# Altium PCB Main Board.PcbDoc
Units mil, origin at the board's own origin, x right, y up, seen from the top; angles counter-clockwise.
Board outline 1968 x 1968 mil, 2 copper layers (Top Layer, Bottom Layer); 67 components, 80 nets, 317 pads, 108 vias.
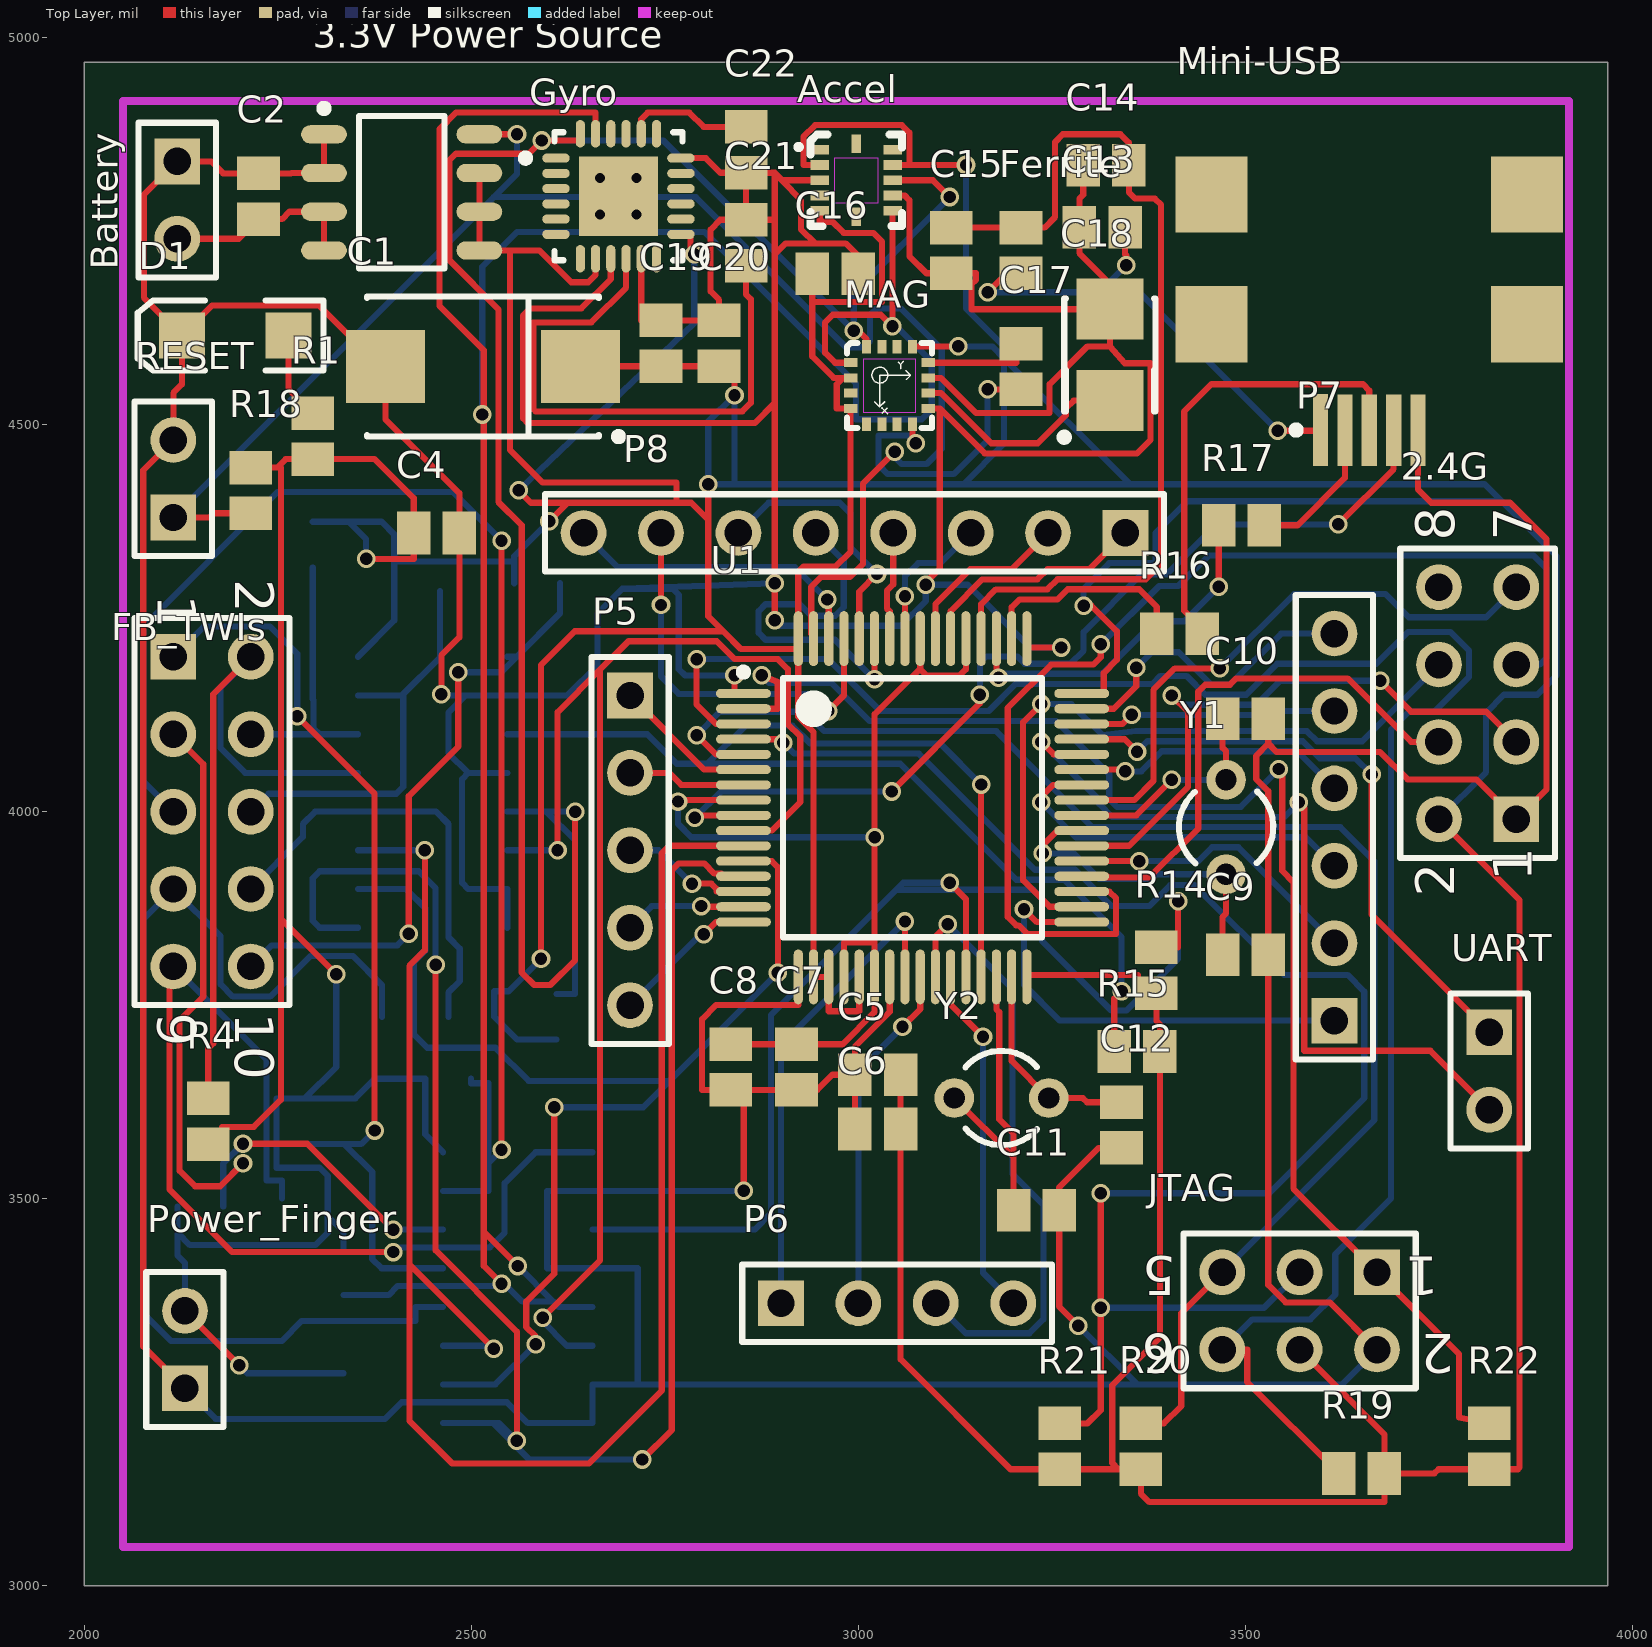
[diagram p0: Top Layer view]
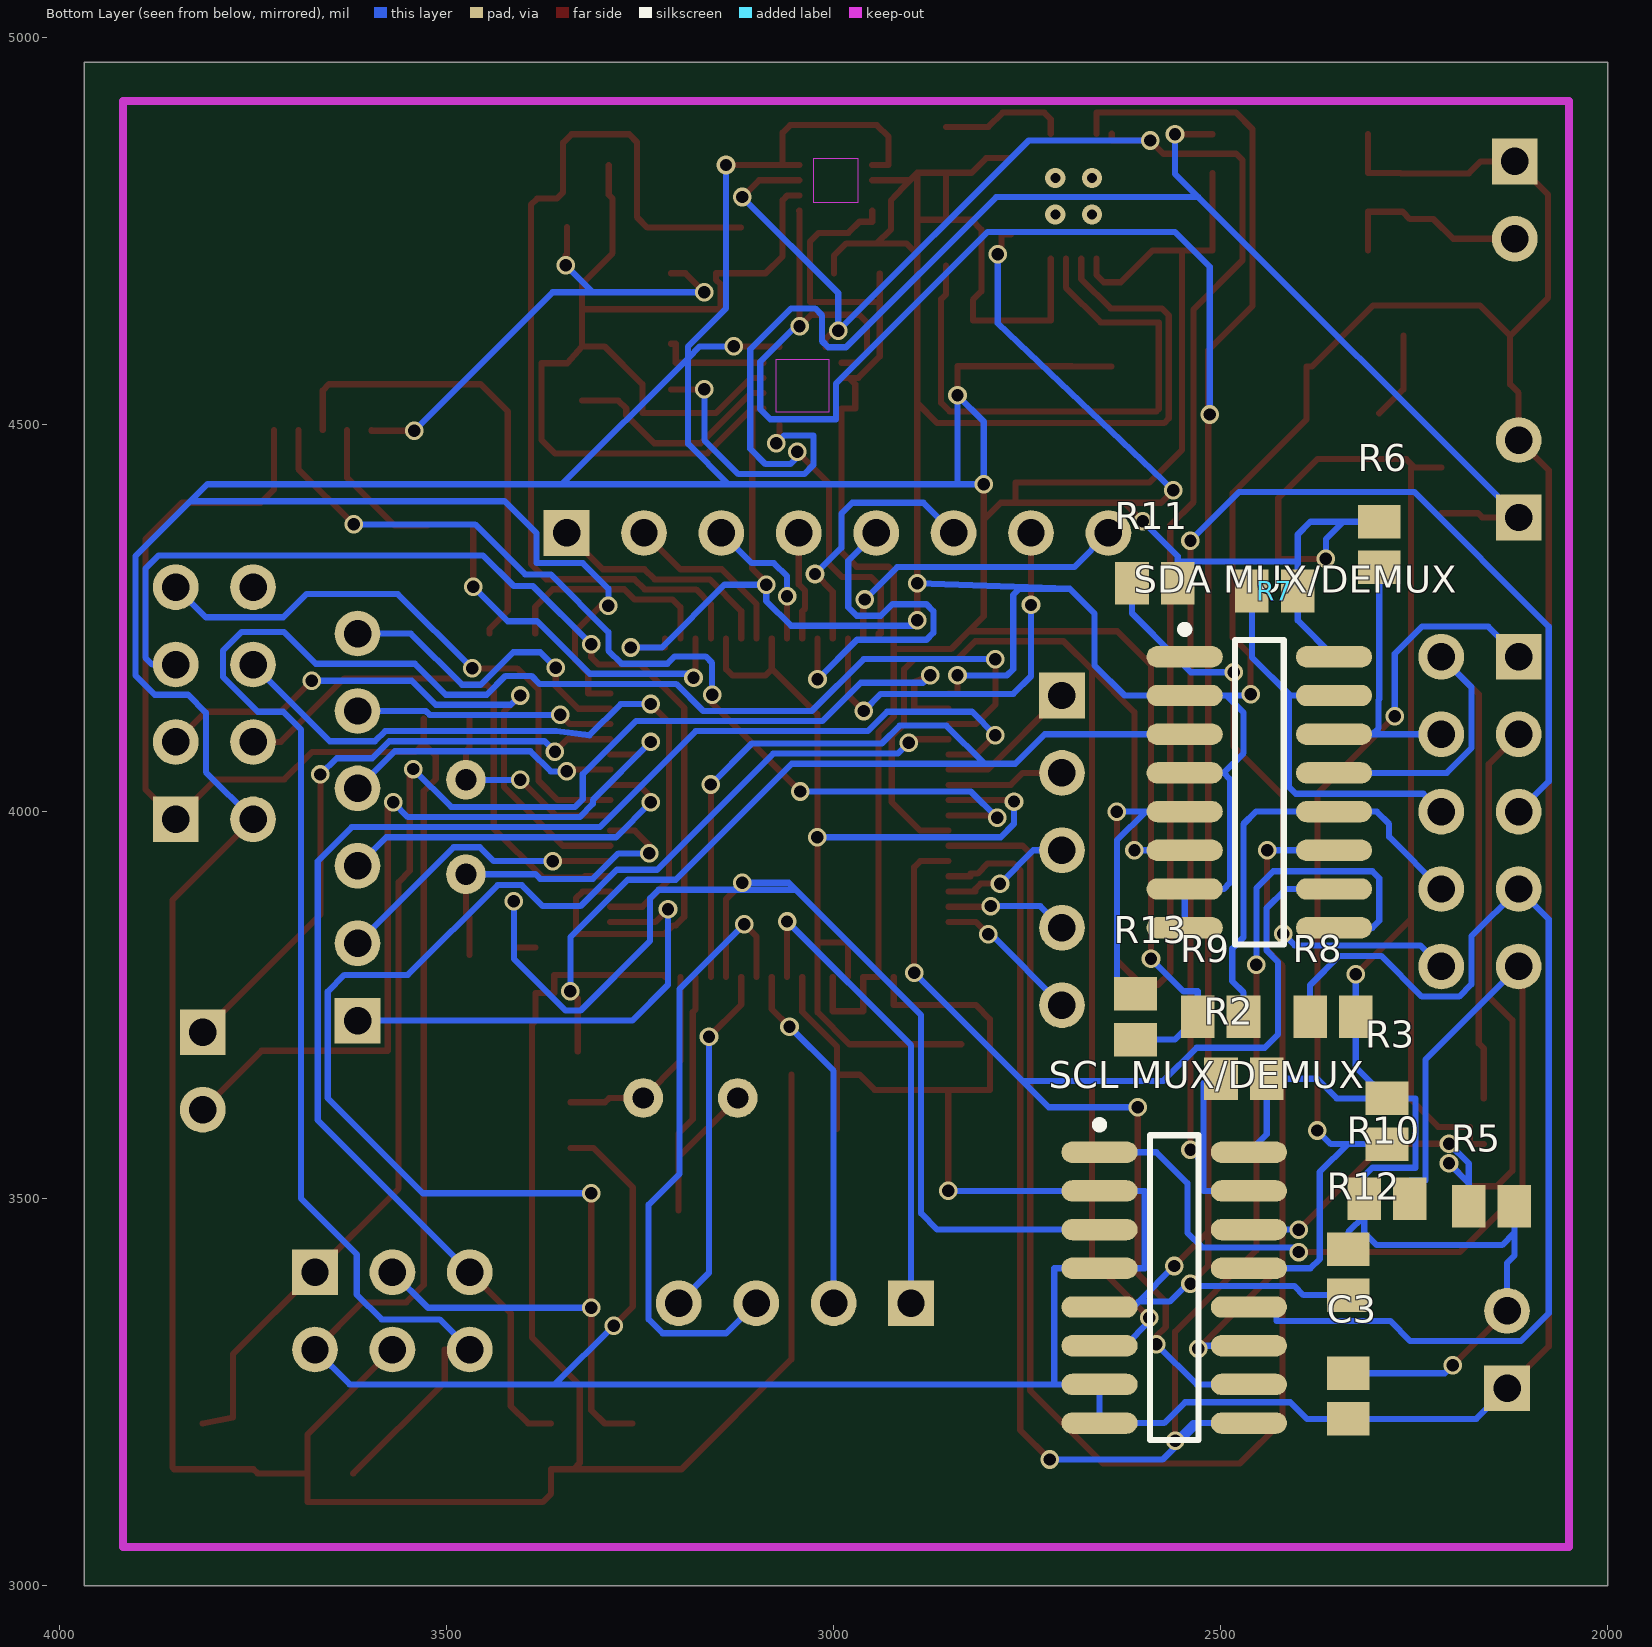
[diagram p1: Bottom Layer view, seen from below]

## Layer stack, top to bottom
Top Layer: signal copper 1.4
Dielectric: core 12.6, FR-4, Dk 4.8
Bottom Layer: signal copper 1.4

## Board outline
2000,3000 3968,3000 3968,4968 2000,4968

## Design rules (kind name [scope] priority, off if disabled: settings)
Clearance [All] p1: gap=5
PlaneClearance [All] p1: clearance=5
PolygonConnect [All] p1: connectstyle=Relief reliefconductorwidth=10 reliefentries=4 polygonreliefangle="90 Angle"
RoutingVias [All] p1: holewidth=16 width=24 viastyle="Through Hole" minholewidth=16 minwidth=24 maxholewidth=16 maxwidth=24
SilkscreenOverComponentPads [All] p1: minsilkscreentomaskgap=10
SolderMaskExpansion [All] p1: expansion=4
Width [All] p1: maxlimit=8 minlimit=8 preferedwidth=8
26 further rules are at their usual default settings.

## Classes and differential pairs
component class U_HMC5883L: C17 C18 MAG
component class 3DMouseMainBoardAssembly: P5 P6 P7 P8 Power_Finger
component class U_3: "3.3V Power Source" Battery C1 C2 D1 R1
component class U_BMA180: Accel C16
component class U_I2C_BUS_MUX: C3 C4 FB_TWIs R2 R3 R4 R5 R6 R7 R8 R9 R10 R11 R12 R13 "SCL MUX/DEMUX" "SDA MUX/DEMUX"
component class U_IMU3000: C19 C20 C21 C22 Gyro
component class "U_Main Board": 2.4G C5 C6 C7 C8 C9 C10 C11 C12 C13 C14 C15 Ferrite JTAG Mini-USB R14 R15 R16 R17 R18 R19 R20 R21 R22 RESET U1 UART Y1 Y2
net class AUX_TWI[1..0]: AUX_TWI0 AUX_TWI1
net class BUS_SEL[2..0]: BUS_SEL0 BUS_SEL1 BUS_SEL2
net class INT5_[2..0]: INT5_0 INT5_1 INT5_2
net class PA[31..0]: PA0 PA1 PA2 PA3 PA4 PA8 PA9 PA10 PA11 PA12 PA13 PA14 PA15 PA16 PA17 PA18 PA19 PA20 PA21 PA22 PA23 PA24 PA25 PA26 PA27 PA28 PA29 PA30 PA31
net class PB[11..0]: PB0 PB1 PB2 PB3 PB4 PB5 PB6 PB7 PB8 PB9 PB10 PB11
net class TWI[1..0]: TWI0 TWI1

## Components (designator, comment, footprint, x,y, rotation, side; value= is the part's Value field where it differs from the comment)
2.4G "Header 4X2" HDR2X4 3850,3990 r90 top
"3.3V Power Source" "TPS7333Q" SOIC127P600-8BL 2410,4800 r0 top
Accel "BMA180" LGA12 2950,4855 r0 top
Battery "Header 2" HDR1X2 2120,4840 r270 top
C1 "Cap Pol1" TC7343-2917 2515,4575 r180 top
C2 "Cap Semi" C0805 2225,4795 r270 top
C3 "Cap Semi" CAPC2012L 2335,3245 r90 bottom
C4 "Cap Semi" CAPC2012L 2455,4360 r180 top
C5 "Cap Semi" CAPC2012L 3025,3660 r0 top
C6 "Cap Semi" CAPC2012L 3025,3590 r0 top
C7 "Cap Semi" CAPC2012L 2920,3670 r90 top
C8 "Cap Semi" CAPC2012L 2835,3670 r90 top
C9 "Cap Semi" CAPC2012L 3500,3815 r180 top
C10 "Cap Semi" CAPC2012L 3500,4120 r180 top
C11 "Cap Semi" CAPC2012L 3230,3485 r180 top
C12 "Cap Semi" CAPC2012L 3340,3595 r90 top
C13 "Cap Semi" CAPC2012L 3315,4755 r180 top
C14 "Cap Semi" CAPC2012L 3320,4835 r180 top
C15 "Cap Semi" CAPC2012L 3120,4725 r270 top
C16 "Cap Semi" CAPC2012L 2970,4695 r180 top
C17 "Cap Semi" CAPC2012L 3210,4575 r90 top
C18 "Cap Pol1" TC3528-1411 3325,4590 r90 top
C19 "Cap Semi" CAPC2012L 2745,4605 r270 top
C20 "Cap Semi" CAPC2012L 2820,4605 r270 top
C21 "Cap Semi" CAPC2012L 2855,4735 r270 top
C22 "Cap Semi" CAPC2012L 2855,4855 r90 top
D1 "LED2" 3.2X1.6X1.1 2195,4615 r180 top
FB_TWIs "Header 5X2" HDR2X5 2115,4200 r270 top
Ferrite "Ferrite Bead 1A" C0805 3210,4725 r90 top
Gyro "IMU3000" QFN50P400X400-24V8M 2690,4795 r0 top
JTAG "Header 3X2" HDR2X3 3670,3405 r180 top
MAG "HMC5883L" HMC5883L 2990,4580 r0 top
Mini-USB "Mini USB" "Mini USB" 3660,4645 r90 top
P5 "Header 5" HDR1X5 2705,4150 r270 top
P6 "Header 4" HDR1X4 2900,3365 r0 top
P7 "Header 8" HDR1X6 3615,3730 r90 top
P8 "Header 7" HDR1X8 3345,4360 r180 top
Power_Finger "Header 2" HDR1X2 2130,3255 r90 top
R1 "Res3" C0805 2295,4485 r90 top
R2 "Res3" C0805 2470,3655 r0 bottom
R3 "Res3" C0805 2285,3600 r270 bottom
R4 "Res3" C0805 2160,3600 r90 top
R5 "Res3" C0805 2150,3490 r0 bottom
R6 "Res3" C0805 2295,4345 r270 bottom
R7 "Res3" C0805 2430,4285 r0 bottom
R8 "Res3" C0805 2355,3735 r0 bottom
R9 "Res3" C0805 2500,3735 r180 bottom
R10 "Res3" C0805 2285,3500 r180 bottom
R11 "Res3" C0805 2585,4295 r0 bottom
R12 "Res3" C0805 2335,3405 r270 bottom
R13 "Res3" C0805 2610,3735 r90 bottom
R14 "Res3" C0805 3385,3795 r270 top
R15 "Res3" C0805 3360,3690 r0 top
R16 "Res3" C0805 3415,4230 r180 top
R17 "Res3" C0805 3495,4370 r180 top
R18 "Res3" C0805 2215,4415 r270 top
R19 "Res3" C0805 3650,3145 r180 top
R20 "Res3" C0805 3365,3180 r90 top
R21 "Res3" C0805 3260,3180 r90 top
R22 "Res3" C0805 3815,3180 r90 top
RESET "Header 2" HDR1X2 2115,4380 r90 top
"SCL MUX/DEMUX" "74LV4051" SOIC16_M 2560,3385 r180 bottom
"SDA MUX/DEMUX" "74LV4051" SOIC16_M 2450,4025 r180 bottom
U1 "AT32UC3B0256-A2UT" TQFP64_N 3070,4005 r0 top
UART "Header 2" HDR1X2 3815,3715 r270 top
Y1 "XTAL 16Mhz" R38 3475,3980 r0 top
Y2 "XTAL 32.768khz" R38 3185,3630 r270 top

## Footprints (in the part's own frame and the unit in brackets; to place one, negate y for a bottom-side part, rotate by r counter-clockwise, add the part's x,y. Pads: shape width x height; smd on the part's side, far side on the other; paste and mask are expansions set on the pad)
3.2X1.6X1.1 [mm] "SMT LED; 2 Flat Leads"
  rect 1.5x1.5 smd: 1(-1.75,0) 2(1.75,0)
  silkscreen extent -2.9,-1.15 3.2,1.15
C0805 [mm] "Chip Capacitor, Body 2.0x1.3mm, IPC High Density"
  rect 1.1x1.4 smd: 1(-0.75,0) 2(0.75,0)
  body extent -1.1,-0.72 1.1,0.72, height 1.4
CAPC2012L [mm] "Chip Capacitor, Body 2.0x1.3mm, IPC High Density"
  rect 1.1x1.4 smd: 1(-0.75,0) 2(0.75,0)
  body extent -1.1,-0.72 1.1,0.72, height 1.1
HDR1X2 [mm] "Connector; Header; 2 Position"
  rect 1.5x1.5 hole 0.9: 1(0,0)
  round 1.5 hole 0.9: 2(2.54,0)
  silkscreen extent -1.27,-1.27 3.81,1.27
HDR1X4 [mm] "Connector; Header; 4 Position"
  rect 1.5x1.5 hole 0.9: 1(0,0)
  round 1.5 hole 0.9: 2(2.54,0) 3(5.08,0) 4(7.62,0)
  silkscreen extent -1.27,-1.27 8.89,1.27
HDR1X5 [mm] "Connector; Header; 5 Position"
  rect 1.5x1.5 hole 0.9: 1(0,0)
  round 1.5 hole 0.9: 2(2.54,0) 3(5.08,0) 4(7.62,0) 5(10.16,0)
  silkscreen extent -1.27,-1.27 11.43,1.27
HDR1X6 [mm] "Connector; Header; 6 Position"
  rect 1.5x1.5 hole 0.9: 1(0,0)
  round 1.5 hole 0.9: 2(2.54,0) 3(5.08,0) 4(7.62,0) 5(10.16,0) 6(12.7,0)
  silkscreen extent -1.27,-1.27 13.97,1.27
HDR1X8 [mm] "Connector; Header; 8 Position"
  rect 1.5x1.5 hole 0.9: 1(0,0)
  round 1.5 hole 0.9: 2(2.54,0) 3(5.08,0) 4(7.62,0) 5(10.16,0) 6(12.7,0) 7(15.24,0) 8(17.78,0)
  silkscreen extent -1.27,-1.27 19.05,1.27
HDR2X3 [mm] "Connector; Header; 3x2 Position"
  rect 1.5x1.5 hole 0.9: 1(0,0)
  round 1.5 hole 0.9: 2(0,2.54) 3(2.54,0) 4(2.54,2.54) 5(5.08,0) 6(5.08,2.54)
  silkscreen extent -1.27,-1.27 6.35,3.81
HDR2X4 [mm] "Connector; Header; 4x2 Position"
  rect 1.5x1.5 hole 0.9: 1(0,0)
  round 1.5 hole 0.9: 2(0,2.54) 3(2.54,0) 4(2.54,2.54) 5(5.08,0) 6(5.08,2.54) 7(7.62,0) 8(7.62,2.54)
  silkscreen extent -1.27,-1.27 8.89,3.81
HDR2X5 [mm] "Connector; Header; 5x2 Position"
  rect 1.5x1.5 hole 0.9: 1(0,0)
  round 1.5 hole 0.9: 2(0,2.54) 3(2.54,0) 4(2.54,2.54) 5(5.08,0) 6(5.08,2.54) 7(7.62,0) 8(7.62,2.54) 9(10.16,0) 10(10.16,2.54)
  silkscreen extent -1.27,-1.27 11.43,3.81
HMC5883L [mm]
  rect 0.45x0.3 smd: 1(0,0) 2(0,-0.5) 3(0,-1) 4(0,-1.5) 9(2.55,-1.5) 10(2.55,-1) 11(2.55,-0.5) 12(2.55,0)
  rect 0.3x0.45 smd: 5(0.525,-2.025) 6(1.025,-2.025) 7(1.525,-2.025) 8(2.025,-2.025) 13(2.025,0.525) 14(1.525,0.525) 15(1.025,0.525) 16(0.525,0.525)
  Keep-Out Layer region: 0.41,-1.62 2.14,-1.62 2.14,0.12 0.41,0.12
  silkscreen extent -0.13,-2.15 2.67,0.65
LGA12 [mm]
  rect 0.6x0.32 smd: 1(0,0) 2(0,-0.5) 3(0,-1) 4(0,-1.5) 5(0,-2) 7(2.4,-2) 8(2.4,-1.5) 9(2.4,-1) 10(2.4,-0.5) 11(2.4,0)
  rect 0.32x0.6 smd: 6(1.2,-2.2) 12(1.2,0.2)
  Keep-Out Layer region: 0.48,-1.742 1.92,-1.742 1.92,-0.272 0.48,-0.272
  silkscreen extent -0.73,-2.51 2.7,0.5, body extent -0.3,-2.5 2.7,0.5, height 0.9
"Mini USB" [mm] "Connector; USB Mini-B, Sinking Type, SM; 5 Position; Right Angle"
  rect 2.35x0.5 smd: 1(-3.862,1.6) 2(-3.862,0.8) 3(-3.862,0) 4(-3.862,-0.8) 5(-3.862,-1.6)
  rect 2.5x2.35 smd: MH1(-0.388,-5.175) MH2(3.863,-5.175) MH3(3.863,5.175) MH4(-0.388,5.175)
  silkscreen extent -3.99,2.28 -3.74,2.52, body extent -1.8,-3.84 6.8,3.86, height 2.54
QFN50P400X400-24V8M [mm] "QFN, 24-Leads, Body 4x4mm, Pitch 0.5mm, IPC Low Density"
  oval 0.9x0.3 smd: 1(-2.05,1.25) 2(-2.05,0.75) 3(-2.05,0.25) 4(-2.05,-0.25) 5(-2.05,-0.75) 6(-2.05,-1.25) 13(2.05,-1.25) 14(2.05,-0.75) 15(2.05,-0.25) 16(2.05,0.25) 17(2.05,0.75) 18(2.05,1.25)
  oval 0.3x0.9 smd: 7(-1.25,-2.05) 8(-0.75,-2.05) 9(-0.25,-2.05) 10(0.25,-2.05) 11(0.75,-2.05) 12(1.25,-2.05) 19(1.25,2.05) 20(0.75,2.05) 21(0.25,2.05) 22(-0.25,2.05) 23(-0.75,2.05) 24(-1.25,2.05)
  rect 2.6x2.6 smd: 25(0,0)
  silkscreen extent -3.17,-2.1 2.1,2.1, body extent -2.07,-2.07 2.07,2.07, height 1
R38 [mm] "Crystal, Thru-Hole; 2 Leads; Body 3.1 x 8.2 mm (Dia.xH)"
  round 1.3 hole 0.7: 1(0,1.55) 2(0,-1.55)
  silkscreen extent -1.55,-1.19 1.55,1.17
SOIC16_M [mm] "SOIC, 16-Leads, Body 9.9x3.9mm, Pitch 1.27mm, IPC Low Density"
  oval 2.5x0.7 smd: 1(-2.45,4.445) 2(-2.45,3.175) 3(-2.45,1.905) 4(-2.45,0.635) 5(-2.45,-0.635) 6(-2.45,-1.905) 7(-2.45,-3.175) 8(-2.45,-4.445) 9(2.45,-4.445) 10(2.45,-3.175) 11(2.45,-1.905) 12(2.45,-0.635) 13(2.45,0.635) 14(2.45,1.905) 15(2.45,3.175) 16(2.45,4.445)
  silkscreen extent -2.58,-5 0.8,5.47, body extent -2,-5 2,5, height 1.91
SOIC127P600-8BL [mm] "SOIC, 8-Leads, Body 4.9x3.9mm, Pitch 1.27mm, IPC High Density"
  oval 1.5x0.6 smd: 1(-2.55,1.905) 2(-2.55,0.635) 3(-2.55,-0.635) 4(-2.55,-1.905) 5(2.55,-1.905) 6(2.55,-0.635) 7(2.55,0.635) 8(2.55,1.905)
  silkscreen extent -2.67,-2.5 1.4,2.88, body extent -2,-2.5 2,2.5, height 2.59
TC3528-1411 [mm] "Capacitor, SM Tantalum; Body 3.5 x 2.8 mm (LxW typ)"
  rect 2x2.2 smd: 1(-1.5,0) 2(1.5,0)
  silkscreen extent -2.82,-1.5 1.85,1.62
TC7343-2917 [mm] "Capacitor, SM Tantalum; Body 7.3 x 4.3 mm (LxW typ)"
  rect 2.6x2.4 smd: 1(-3.2,0) 2(3.2,0)
  silkscreen extent -4.58,-2.3 3.8,2.42
TQFP64_N [mm] "Thin QFP, 64-Leads, Body 10x10mm, Pitch 0.5mm, IPC Medium Density"
  oval 1.8x0.3 smd: 1(-5.55,3.75) 2(-5.55,3.25) 3(-5.55,2.75) 4(-5.55,2.25) 5(-5.55,1.75) 6(-5.55,1.25) 7(-5.55,0.75) 8(-5.55,0.25) 9(-5.55,-0.25) 10(-5.55,-0.75) 11(-5.55,-1.25) 12(-5.55,-1.75) 13(-5.55,-2.25) 14(-5.55,-2.75) 15(-5.55,-3.25) 16(-5.55,-3.75) 33(5.55,-3.75) 34(5.55,-3.25) 35(5.55,-2.75) 36(5.55,-2.25) 37(5.55,-1.75) 38(5.55,-1.25) 39(5.55,-0.75) 40(5.55,-0.25) 41(5.55,0.25) 42(5.55,0.75) 43(5.55,1.25) 44(5.55,1.75) 45(5.55,2.25) 46(5.55,2.75) 47(5.55,3.25) 48(5.55,3.75)
  oval 0.3x1.8 smd: 17(-3.75,-5.55) 18(-3.25,-5.55) 19(-2.75,-5.55) 20(-2.25,-5.55) 21(-1.75,-5.55) 22(-1.25,-5.55) 23(-0.75,-5.55) 24(-0.25,-5.55) 25(0.25,-5.55) 26(0.75,-5.55) 27(1.25,-5.55) 28(1.75,-5.55) 29(2.25,-5.55) 30(2.75,-5.55) 31(3.25,-5.55) 32(3.75,-5.55) 49(3.75,5.55) 50(3.25,5.55) 51(2.75,5.55) 52(2.25,5.55) 53(1.75,5.55) 54(1.25,5.55) 55(0.75,5.55) 56(0.25,5.55) 57(-0.25,5.55) 58(-0.75,5.55) 59(-1.25,5.55) 60(-1.75,5.55) 61(-2.25,5.55) 62(-2.75,5.55) 63(-3.25,5.55) 64(-3.75,5.55)
  silkscreen extent -5.67,-4.25 4.25,4.57, body extent -5,-5 5,5, height 1.2

## Part data
2.4G: "Header, 4-Pin, Dual row"
Battery Power_Finger RESET UART: "Header, 2-Pin"
C1 C18: "Polarized Capacitor (Radial)"
C2 C3 C4 C5 C6 C7 C8 C9 C10 C11 C12 C13 C14 C15 C16 C17 C19 C20 C21 C22: "Capacitor (Semiconductor SIM Model)"
D1: "Typical RED, GREEN, YELLOW, AMBER GaAs LED"
FB_TWIs: "Header, 5-Pin, Dual row"
Ferrite: library part "Ferrite Bead"
JTAG: "Header, 3-Pin, Dual row"
P5: "Header, 5-Pin"
P6: "Header, 4-Pin"
P7: library part "Header 6", "Header, 6-Pin"
P8: library part "Header 8", "Header, 8-Pin"
R1 R2 R3 R4 R5 R6 R7 R8 R9 R10 R11 R12 R13 R14 R15 R16 R17 R18 R19 R20 R21 R22: "Resistor"
U1: "32-bit AVR UC3 B Series Microcontroller, 256KB Flash, 32KB SRAM, 44 GPIO pins, Industrial Grade, 64-Pin TQFP, Tray"
Y1 Y2: library part XTAL, "Crystal Oscillator"

## Via types
v1: diameter 24, hole 16, Top Layer to Bottom Layer, 104 vias
v2: diameter 25.98, hole 12.99, Top Layer to Bottom Layer, tented top, 4 vias

## Nets (pads, with @x,y where several pads share a name; then routed paths per layer and width w, separated by ;. In a path a pad name is that pad's centre, name@x,y a point inside that pad or via, vN(x,y) a via of type N, cw(c..) or ccw(c..) an arc to the next point about the centre after c; other vN are vias at no path point)
3.3VCC: 2.4G.2 "3.3V Power Source.5" "3.3V Power Source.6" "3.3V Power Source.7" "SCL MUX/DEMUX.16" "SDA MUX/DEMUX.16" Accel.2 Accel.5 Accel.10 C1.1 C3.2 C4.2 C5.2 C6.2 C16.2 C19.2 C20.2 Gyro.8 Gyro.13 JTAG.4 MAG.2 MAG.4 MAG.13 Power_Finger.2 R1.1 R2.1 R3.1 R4.1 R5.1 R6.1 R7.1 R8.1 R9.1 R10.1 R11.1 R12.1 R13.1 R14.2 R15.2 R18.1 R19.1 R20.1 R21.1 R22.1 U1.18 U1.19 U1.21 U1.32 U1.48 U1.64 | length 14740.9
  Top Layer w8: Power_Finger.2 v1(2200,3285) ; R4.1 2177.97,3570.47 2177.97,3592.58 2219.1,3592.58 2254,3627.47 2254,3861.47 ; R18.1 2249,4444.53 ; v1(2325.47,3790) 2254,3861.47 ; v1(2364,4326.47) 2425.47,4326.47 C4.2 2425.47,4405 2375,4455.47 R1.1 2259.94,4455.47 2249,4444.53 ; 2510.39,4825 2510.39,4775 2510.39,4725 2550,4725 ; v1(2561,4415) 2577,4399 2624.47,4399 ; v1(2590,3810) 2590,4189.5 2633.5,4233 2825.36,4233 ; v1(2600.74,4375.26) 2624.47,4399 ; C1.1 2692,4575 2692.47,4575.47 C19.2 C20.2 2840,4575.47 v1(2840,4538) ; Gyro.8 2660.47,4693.47 2651,4684 2629,4684 2588,4725 2550,4725 ; Gyro.13 2783,4745.79 2783,4725 v1(2788,4720) ; v1(2806,4423) 2806,4377 ; C16.2 2940.47,4658.44 ; Accel.5 2950,4762 2966.57,4762 2981,4747.57 3019.43,4747.57 3030.36,4736.64 3030.36,4658.44 2940.47,4658.44 ; Accel.2 2929,4835.32 2929,4872 2944,4887 3056,4887 3066,4877 3066,4835.32 ; MAG.2 2980.32,4560.32 ; U1.21 3001.1,3742 2961.73,3742 U1.19 U1.18 2942.05,4102.82 2922.36,4122.51 U1.64@2922.36,4210 ; Accel.10 3066,4835.32 ; C5.2 C6.2 3054.53,3292.47 3196.53,3150.47 R21.1 3336,3150.47 ; MAG.13 3069.72,4601 v1(3129,4601) ; v1(3139,4835.32) 3066,4835.32 ; U1.32 3217.64,3789 3361,3789 3361,3765.47 R14.2 3385,3729.53 3389.53,3725 R15.2 3389.53,3320.53 3328,3259 3328,3158.47 3336,3150.47 ; U1.48 3317,4152.64 3317,4179 3334,4196 3334,4233.14 3301.14,4266 v1(3291,4266) ; JTAG.4 3679.53,3195.47 R19.1 ; 2.4G.2 3854,3886 3854,3152.47 3852,3150.47 R22.1 3749.47,3150.47 3744,3145 R19.1 ; 2249,4444.53 2254,4444.53 2254,3861.47 ; 2550,4725 2550,4467 2592,4425 2765,4425 2765,4399 ; 2624.47,4399 2765,4399 ; 2765,4399 2784,4399 2806,4377 ; 2806,4377 2806,4252.36 2825.36,4233 ; 2825.36,4233 2848.36,4210 U1.64@2922.36,4210 ; U1.64@2922.36,4210 U1.64 2922.36,4309.59 2929.04,4316.27 2970.27,4316.27 2990,4336 MAG.4 2972,4520.95 2972,4552 2980.32,4560.32 ; 2940.47,4658.44 2940.47,4588 2968.16,4560.32 2980.32,4560.32 ; 3336,3150.47 R20.1 3365,3119 3376,3108 3679.53,3108 R19.1
  Bottom Layer w8: R5.1 2120.47,3456 ; Power_Finger.2 2130,3417 2120.47,3426.53 2120.47,3456 ; v1(2200,3285) 2210.47,3274.53 C3.2 ; R6.1 2341.47,4374.53 ; v1(2325.47,3790) R8.1 2325.47,3670 R3.1 ; R12.1 2335,3457 R10.1@2314.53,3477.47 ; 2353.54,4200 2400.47,4246.93 R7.1 2400.47,4323 ; v1(2364,4326.47) 2364,4352 2341.47,4374.53 ; 2463.54,3560 2440.47,3583.07 R2.1 2375.47,3655 2350,3629.53 R3.1 ; R11.1 2555.47,4323 ; v1(2561,4415) 2788,4631 v1(2788,4720) ; v1(2590,3810) 2548,3768 2529.53,3768 R9.1 2559.06,3705.47 R13.1 ; v1(2600.74,4375.26) 2555.47,4330 2555.47,4323 ; v1(3129,4601) 3173,4601 3188,4586 ; v1(3139,4835.32) 3139,4650 3188,4601 3188,4586 ; v1(3291,4266) 3291,4288 3324,4321 3384,4321 3384,4360 3425,4401 3831,4401 ; 2.4G.2 3811,4051 3811,4128 3834,4151 3877,4151 3902,4176 3902,4330 3831,4401 ; 2120.47,3456 2136.47,3440 2298.53,3440 2314.53,3456 R10.1@2314.53,3477.47 ; R3.1 2248.44,3629.53 2248.44,3539.82 2304,3539.82 2314.53,3529.29 R10.1 R10.1@2314.53,3477.47 ; 2341.47,4374.53 2383.94,4374.53 2400.47,4358 2400.47,4323 ; 2400.47,4323 2555.47,4323 ; 2840,4423 v1(2806,4423) 2806,4504 v1(2840,4538) 2840,4423 ; 2840,4423 3136,4423 ; 3136,4423 3351,4423 ; 3136,4423 3188,4475 3188,4586 ; 3188,4586 3351,4423 ; 3351,4423 3809,4423 3831,4401
AUX_TWI0: Gyro.7
AUX_TWI1: Gyro.6
BUS_SEL0: "SCL MUX/DEMUX.11" "SDA MUX/DEMUX.11" U1.11 | length 2244.3
  Top Layer w8: v1(2440,3950) 2440,3820.6 2420,3800.6 2420,3415 ; v1(2529,3306) 2420,3415 ; U1.11 2755.79,3955.79 2746,3946 2746,3252 2652,3158 2475,3158 2420,3213 2420,3415
  Bottom Layer w8: 2353.54,3950 v1(2440,3950) ; 2463.54,3310 2525,3310 v1(2529,3306)
BUS_SEL1: "SCL MUX/DEMUX.10" "SDA MUX/DEMUX.10" U1.12 | length 1633.5
  Top Layer w8: v1(2583,3312) 2583,3322 2571,3334 2571,3367 2607,3403 v1(2607,3618) ; U1.12 2888,3936.1 2896,3928.1 v1(2896,3792)
  Bottom Layer w8: 2353.54,3900 2416,3900 2440.76,3875.24 2440.76,3820.6 2426,3805.84 2426,3712 2443,3695 2531,3695 2574,3652 2756,3652 ; 2463.54,3260 2531,3260 v1(2583,3312) ; v1(2607,3618) 2722,3618 2756,3652 ; v1(2896,3792) 2756,3652
BUS_SEL2: "SCL MUX/DEMUX.9" "SDA MUX/DEMUX.9" U1.13 | length 2245.8
  Top Layer w8: v1(2453.76,3802) 2453.76,3433.24 2558.88,3328.12 v1(2558.88,3187) ; v1(2721,3163) 2759,3201 2759,3924 2768,3933 2801.08,3933 2814.08,3920 2823,3920 2823,3916.42 U1.13
  Bottom Layer w8: 2353.54,3850 2304,3850 2295,3859 2295,3914 2304,3923 2432,3923 2453.76,3901.24 v1(2453.76,3802) ; 2463.54,3210 2528,3210 ; v1(2558.88,3187) 2535.88,3210 2528,3210 ; v1(2721,3163) 2575,3163 2528,3210
GND: 2.4G.1 "3.3V Power Source.1" "3.3V Power Source.2" "SCL MUX/DEMUX.2" "SCL MUX/DEMUX.4" "SCL MUX/DEMUX.7" "SCL MUX/DEMUX.8" "SDA MUX/DEMUX.2" "SDA MUX/DEMUX.4" "SDA MUX/DEMUX.7" "SDA MUX/DEMUX.8" Accel.3 Accel.8 Battery.1 C1.2 C2.1 C3.1 C4.1 C5.1 C6.1 C7.1 C8.1 C9.1 C10.1 C11.1 C12.1 C13.2 C14.2 C15.2 C16.1 C18.2 C19.1 C20.1 C21.1 C22.1 D1.2 Gyro.9 Gyro.11 Gyro.18 JTAG.2 MAG.9 MAG.11 Mini-USB.5 Power_Finger.1 RESET.2 U1.1 U1.17 U1.23 U1.49 | length 13629
  Top Layer w8: Power_Finger.1 2076,3309 2076,4441 RESET.2 2115,4541 2126.1,4552.1 D1.2 ; 2309.61,4875 2309.61,4825 2267.47,4825 2267,4824.53 C2.1 2179.47,4824.53 2164,4840 Battery.1 2077,4797 2077,4664.1 D1.2 ; v1(2461.24,4151.76) 2461.24,4201.78 2484.53,4225.07 C4.1 2484.53,4411.47 2389.02,4506.98 C1.2 2382,4575 2303,4654 2165.1,4654 D1.2 ; Gyro.9 2680.16,4688 2642.16,4650 2576,4650 2567,4641 2567,4508 2572.98,4502.02 2866.14,4502.02 2892,4527.88 ; Gyro.11 2719.53,4634.53 C19.1 C20.1 2820,4661 2809,4672 2809,4752 2821.53,4764.53 C21.1 ; Gyro.18 2803,4844.21 2821.74,4825.47 C22.1 ; v1(2840,4176) 2840,4152.64 U1.1 ; v1(2852,3510) C8.1@2852,3640.47 ; v1(2892,4247) v1(2892,4295) 2892,4527.88 ; U1.17 2922.36,3750 2816,3750 2798,3732 2798,3640.47 C8.1 C8.1@2852,3640.47 ; Accel.3 2901.3,4815.63 ; C6.1 C5.1 ; C16.1 2999.53,4718 2983.53,4734 2944,4734 ; U1.23 3040.47,3741.47 2995.47,3696.47 C5.1 ; Accel.8 3060,4795.95 3066,4789.95 3066,4717.47 3088,4695.47 C15.2 3152,4695.47 3152,4687.06 3146,4681.06 3146,4649.06 C18.2 ; v1(3087,4293) 3087,4296 3105,4314 3105,4520.95 ; MAG.9 3105,4520.95 ; MAG.11 3106.5,4560.32 3152,4514.82 3247,4514.82 3247,4552 3296,4601 3325,4601 ; U1.49 3217.64,4212 v1(3262,4212) ; v1(3284,3336) 3259.53,3360.47 C11.1 3259.53,3514.53 3310.47,3565.47 C12.1 ; C14.2 3290.47,4797 3285.47,4792 C13.2 3285.47,4721.53 3325,4682 C18.2 ; C10.1 3529.53,4088 ; JTAG.2 3609,3366 3552,3366 3529.53,3388.47 C9.1 3529.53,4026.47 3514,4042 3514,4072 3529.53,4088 ; Mini-USB.5 3722.99,4416 3739.99,4399 3842,4399 3889,4352 3889,4029 2.4G.1 3798.47,4041.53 3709.47,4041.53 3674,4077 3540.53,4077 3529.53,4088 ; C8.1@2852,3640.47 C7.1 2947,3640.47 2966.53,3660 C5.1 ; C21.1 2892,4764.53 ; C21.1 C22.1 ; C22.1 2892,4825.47 ; 2892,4527.88 2892,4720 ; 2892,4720 2892,4764.53 ; 2892,4720 2906,4734 2944,4734 ; 2892,4764.53 2892,4825.47 ; 2892,4825.47 2901.3,4815.63 ; 2901.3,4815.63 2926,4789.47 2926,4752 2944,4734 ; 3105,4520.95 3163.13,4462.82 3360.13,4462.82 3377.31,4480 3377.31,4579.32 3344,4579.32 3325,4601 ; 3325,4601 C18.2
  Bottom Layer w8: Power_Finger.1 2169.53,3215.47 C3.1 2388.47,3215.47 2410,3237 2546,3237 2573,3210 2656.46,3210 2656.46,3260 2715,3260 ; v1(2461.24,4151.76) 2463,4150 2492.33,4150 ; 2546.46,3850 2546.46,3900 2496,3900 2488,3908 2488,4042 2496,4050 ; 2546.46,4050 2496,4050 ; v1(2840,4176) 2776,4176 2768,4184 2768,4280 2760,4288 2695,4288 ; v1(2852,3510) 2656.46,3510 2598,3510 2598,3410 2656.46,3410 2715,3410 2715,3260 ; v1(2892,4247) 2892,4240 3055,4240 3087,4272 v1(3087,4293) 3141.06,4293 3222.06,4212 v1(3262,4212) ; v1(2892,4295) 2695,4288 ; v1(3284,3336) 3360,3260 ; JTAG.2 3625,3260 3360,3260 ; 2492.33,4150 2470.33,4128 2470.33,4075.67 2496,4050 ; 2492.33,4150 2546.46,4150 2624,4150 2663,4189 2663,4256 2695,4288 ; 2715,3260 3360,3260
INT5_0: Gyro.12
INT5_1: Accel.4
INT5_2: MAG.15
IRQ: 2.4G.8
JTAG_TCK: JTAG.1 R22.2 U1.2 | length 1853.1
  Top Layer w8: U1.2 2895.93,4132.95 2895.93,4167.54 v1(2875,4176) ; v1(3543,4055) 3547.47,4050.53 3547.47,3923.53 3562,3909 3562,3513 JTAG.1 3776,3299 3776,3217.53 R22.2
  Bottom Layer w8: v1(2875,4176) 2884.43,4166.57 2964.85,4166.57 3014.42,4117 3255.46,4117 3324,4048.46 3324,4016 3334,4006 3494,4006 v1(3543,4055)
NetC7_2: C7.2 C8.2 U1.8 U1.20 U1.22 U1.53 U1.56 | length 1478.8
  Top Layer w8: v1(2767,4013) 2768.84,4014.84 U1.8 ; C8.2 C7.2 2979.53,3699.53 3020.79,3740.79 U1.22 ; U1.20 2981.42,3831 3020.79,3831 U1.22 ; v1(3021,3967) 3021,4126 ; U1.56 3079.84,4184.84 ; U1.53 3138.9,4184 3130.8,4175.9 3087.94,4175.9 3079.84,4184 3079.84,4184.84 ; U1.22 3020.9,3967 3021,4126 ; 3021,4126 3079.84,4184.84
  Bottom Layer w8: v1(2767,4013) 2767,3984 2784,3967 v1(3021,3967)
NetC13_1: C13.1 Ferrite.1 Mini-USB.1 | length 657.3
  Top Layer w8: v1(3167,4671) 3191.47,4695.47 Ferrite.1 ; C13.1 3344.53,4720 3346,4718.53 v1(3346,4706) ; v1(3542,4492) 3597.01,4492 Mini-USB.1
  Bottom Layer w8: v1(3167,4671) 3311,4671 ; v1(3346,4706) 3311,4671 ; v1(3542,4492) 3363,4671 3311,4671
NetC17_1: C17.1 MAG.8 | length 388.9
  Top Layer w8: MAG.8 3069.72,4480.28 v1(3074,4476) ; v1(3167,4545.47) C17.1
  Bottom Layer w8: v1(3074,4476) 3064,4486 3026,4486 3026,4448 3038,4436 3123,4436 3167,4480 v1(3167,4545.47)
NetC17_2: C17.2 MAG.12 | length 144.1
  Top Layer w8: MAG.12 3204,4580 3204,4604.53 C17.2
NetC18_1: C18.1 MAG.10 | length 289.5
  Top Layer w8: MAG.10 3106.82,4540.63 3171.63,4475.82 3231.65,4475.82 3267.83,4512 3267.83,4520.83 3277.94,4530.94 C18.1
NetC21_2: C21.2 Gyro.10 | length 754.8
  Top Layer w8: Gyro.10 2699.84,4677 2654.84,4632 2580,4632 2580,4520 2583.02,4516.98 2850.14,4516.98 2861.17,4528 2861.17,4661.83 2855,4668 C21.2
NetC22_2: C22.2 Gyro.20 | length 165.5
  Top Layer w8: Gyro.20 2719.53,4894.53 2728,4903 2781.53,4903 2800,4884.53 C22.2
NetD1_1: D1.1 R1.2 | length 113.4
  Top Layer w8: D1.1 2263.9,4545.63 R1.2
NetR16_2: R16.2 U1.50 | length 281.6
  Top Layer w8: U1.50 3197.95,4264 3207.95,4274 3257.18,4274 3270.39,4287.21 3362.79,4287.21 3385.47,4264.53 R16.2
NetR17_2: R17.2 U1.51 | length 464.3
  Top Layer w8: U1.51 3178.27,4175.73 v1(3181,4173) ; v1(3465.47,4290.47) R17.2
  Bottom Layer w8: v1(3181,4173) 3186,4178 3315,4178 3383,4246 3421,4246 v1(3465.47,4290.47)
PA0: JTAG.6 R19.2 U1.3 | length 2567.3
  Top Layer w8: v1(2791,4197) 2791,4138.27 2816,4113.27 U1.3 ; JTAG.6 3502.47,3305 3502.47,3263 R19.2
  Bottom Layer w8: v1(2791,4197) 2961,4197 3028,4130 3168.47,4130 3203.47,4165 3380,4165 3390.19,4175.19 3424,4175.19 3448.19,4151 3501,4151 3541,4191 3669,4191 3710,4232 3765,4232 3789,4208 3789,4174 3744,4129 3711,4129 3688,4106 3688,3500 3616,3428 3616,3376 3584,3344 3509,3344 JTAG.6
PA1: JTAG.3 R21.2 U1.4 | length 2105
  Top Layer w8: U1.4 2898.42,4093.58 v1(2903,4089) ; R21.2 3296,3209.53 3313,3226.53 v1(3313,3359) v1(3313,3507)
  Bottom Layer w8: v1(2903,4089) 2917,4075 3078,4075 3228,3925 3280,3925 3327,3878 3376,3878 3403,3905 3434,3905 3550,3789 3632,3789 3653.53,3767.47 3653.53,3630 3530.53,3507 v1(3313,3507) ; v1(3313,3359) 3524,3359 JTAG.3
PA2: JTAG.5 R20.2 U1.5 | length 1907.5
  Top Layer w8: v1(2791,4098.9) 2816,4073.9 U1.5 ; R20.2 3394.53,3209.53 3417,3232 3417,3352 JTAG.5
  Bottom Layer w8: v1(2791,4098.9) 2821.1,4129 2931,4129 2956,4104 3178.21,4104 3302.21,3980 3622.53,3980 3666.53,3936 3666.53,3601.53 JTAG.5
PA3: Mini-USB.4 U1.9 | length 1256
  Top Layer w8: v1(2788.84,3992) 2792,3995.16 U1.9 ; v1(3043,4026) 3157,4140 v1(3157,4151) ; v1(3620,4371) 3691.5,4442.5 Mini-USB.4
  Bottom Layer w8: v1(2788.84,3992) 2822.84,4026 v1(3043,4026) ; v1(3157,4151) 3157,4192 3165.46,4200.46 3205.19,4200.46 3214.65,4191 3274,4191 3291,4208 3291,4232 3365.43,4306.43 3398.57,4306.43 3463.15,4371 v1(3620,4371)
PA4: "SCL MUX/DEMUX.6" "SDA MUX/DEMUX.6" U1.10 | length 1810.3
  Top Layer w8: v1(2592,3346) 2666,3420 2666,4182.98 ; v1(2611.34,3950) 2611.34,4128.32 2666,4182.98 ; U1.10 2888,3975.47 2924.93,4012.4 2924.93,4097.07 2908.93,4113.07 2908.93,4184.07 2896,4197 2840,4197 2817,4220 2703.02,4220 2666,4182.98
  Bottom Layer w8: 2546.46,3950 v1(2611.34,3950) ; v1(2592,3346) 2592,3341.54 2623.54,3310 2656.46,3310
PA8: P5.3 U1.14 | length 170.5
  Top Layer w8: v1(2785,3907) 2810,3907 2817,3900 2817,3896.73 U1.14
  Bottom Layer w8: P5.3 2742,3950 v1(2785,3907)
PA9: "SCL MUX/DEMUX.3" R14.1 U1.28 | length 1577.3
  Top Layer w8: v1(3118,3908) 3138.9,3887.1 U1.28 ; R14.1 3413,3824.53 v1(3413,3884)
  Bottom Layer w8: 2656.46,3460 2866,3460 2887,3481 2887,3737 3049,3899 ; v1(3118,3908) 3058,3908 3049,3899 ; v1(3413,3884) 3413,3810 3346,3743 3327,3743 3237.07,3832.93 3237.07,3888 3226.07,3899 3049,3899
PA10: "SDA MUX/DEMUX.3" R15.1 U1.29 | length 1708
  Top Layer w8: U1.29 v1(3158.58,4035) ; R15.1 3330.47,3758.47 v1(3340,3768)
  Bottom Layer w8: 2546.46,4100 2727.33,4100 2765.44,4061.9 2804.91,4061.9 ; v1(3158.58,4035) 3105.58,4088 2937.9,4088 2914.72,4111.18 2854.19,4111.18 2804.91,4061.9 ; v1(3340,3768) 3340,3837.74 3265.74,3912 3204,3912 3054.1,4061.9 2804.91,4061.9
PA11: C11.2 U1.30 Y2.2 | length 418.9
  Top Layer w8: Y2.2 3200.47,3553.5 ; U1.30 3178.27,3744.73 3182,3741 3182,3602.47 3200.47,3584 3200.47,3553.5 ; C11.2 3200.47,3553.5
PA12: C12.2 U1.31 Y2.1 | length 272.7
  Top Layer w8: U1.31 3197.95,3678.07 Y2.1 3290,3630 3295.47,3624.53 C12.2
PA13: P7.1 U1.33 | length 599.4
  Top Layer w8: v1(3214,3874) 3230.64,3857.36 U1.33
  Bottom Layer w8: v1(3214,3874) 3214,3776 3260,3730 P7.1
PA14: 2.4G.6 U1.34 | length 904.8
  Top Layer w8: v1(3236,4139) 3212.73,4115.73 3212.73,3911.27 3246.95,3877.05 U1.34
  Bottom Layer w8: v1(3236,4139) 3275,4139 3315.42,4098.58 3358,4104.02 3579.5,4104.02 3592.53,4091 3651,4091 2.4G.6
PA15: 2.4G.5 U1.35 | length 1465.3
  Top Layer w8: U1.35 3324.27,3896.73 3333,3888 3333,3842 3218,3842 3207,3853 3204,3853 3193,3864 3193,4134 3249.02,4190.02 3303.58,4190.02 3313,4199.44 v1(3313,4216)
  Bottom Layer w8: v1(3313,4216) 3388.46,4291.46 3413.54,4291.46 3453.08,4331 3872,4331 3889,4314 3889,4199 3880,4190 2.4G.5
PA16: 2.4G.4 U1.36 | length 707
  Top Layer w8: U1.36 3321,3916.42 3321,3915 3376,3915 3439,3978 3439,4155 3448,4164 3480,4164 3488,4172 3632,4172 3714,4090 2.4G.4
PA17: P7.2 U1.37 | length 385.3
  Top Layer w8: U1.37 v1(3363,3936.1)
  Bottom Layer w8: v1(3363,3936.1) 3439.1,3936.1 3457,3954 3491,3954 P7.2
PA18: C9.2 U1.39 Y1.2 | length 427.8
  Top Layer w8: v1(3238,3946) 3238,3956.47 3257,3975.47 U1.39 ; C9.2 3470.47,3864 3475,3868.53 Y1.2
  Bottom Layer w8: v1(3238,3946) 3278,3946 3311,3913 3379,3913 3384.98,3918.98 Y1.2
PA19: C10.2 U1.40 Y1.1 | length 286.3
  Top Layer w8: U1.40 3359.13,3995.16 v1(3405,4041.02) ; C10.2 3470.47,4082.53 3475,4078 Y1.1
  Bottom Layer w8: v1(3405,4041.02) Y1.1
PA20: U1.44 UART.2 | length 1037.5
  Top Layer w8: v1(3236,4090) 3252.1,4073.9 U1.44 ; v1(3569,4012) 3576,4005 3576,3691 3739,3691 UART.2
  Bottom Layer w8: v1(3236,4090) 3311,4015 3311,4010 3328,3993 3550,3993 v1(3569,4012)
PA21: U1.45 UART.1 | length 800.5
  Top Layer w8: U1.45 3344,4093.58 v1(3360,4077.58) ; v1(3663,4048) 3663,3867 UART.1
  Bottom Layer w8: v1(3360,4077.58) 3373.44,4091.02 3573.98,4091.02 3596,4069 3642,4069 v1(3663,4048)
PA22: P7.5 U1.46 | length 333.4
  Top Layer w8: U1.46 3341.27,4113.27 v1(3353,4125)
  Bottom Layer w8: v1(3353,4125) 3522,4125 3527,4130 P7.5
PA23: P7.6 U1.47 | length 415.6
  Top Layer w8: U1.47 3330,4132.95 3359,4161.95 v1(3359,4186)
  Bottom Layer w8: v1(3359,4186) 3379,4206 3414,4206 3456,4164 3480,4164 3546,4230 P7.6
PA24: P8.5 U1.59 | length 490.6
  Top Layer w8: v1(3020.79,4171) U1.59
  Bottom Layer w8: P8.5 2981,4324 2981,4264 2970,4253 2939,4253 2924,4268 2880,4268 2871,4259 2871,4231 2880,4222 2969.79,4222 v1(3020.79,4171)
PA25: P8.6 U1.60 | length 352
  Top Layer w8: U1.60 3001.1,4284.1 v1(3024,4307)
  Bottom Layer w8: P8.6 2884,4399 2976,4399 2990,4385 2990,4341 v1(3024,4307)
PA26: P8.7 U1.61 | length 521.6
  Top Layer w8: v1(2745,4267) P8.7 ; v1(2961,4130) 2981.42,4150.42 U1.61
  Bottom Layer w8: v1(2745,4267) 2745,4175 2768,4152 2939,4152 v1(2961,4130)
PA27: P8.8 U1.62 | length 401.8
  Top Layer w8: v1(2960,4274) 2961.73,4272.27 U1.62
  Bottom Layer w8: P8.8 2689,4316 2918,4316 v1(2960,4274)
PA28: 2.4G.7 U1.41 | length 769.2
  Top Layer w8: U1.41 3356.46,4014.84 3381.16,4039.54 3381.16,4157.16 3409,4185 v1(3467,4185)
  Bottom Layer w8: v1(3467,4185) 3563,4281 3681,4281 3711,4251 3811,4251 2.4G.7
PA29: P7.3 U1.42 | length 478.9
  Top Layer w8: v1(3236,4012) 3236,4019 3251.53,4034.53 U1.42
  Bottom Layer w8: v1(3236,4012) 3281,3967 3578,3967 P7.3
PA30: P5.4 U1.15 | length 158.5
  Top Layer w8: v1(2797,3878) 2797.95,3877.05 U1.15
  Bottom Layer w8: P5.4 2733,3878 v1(2797,3878)
PA31: P5.5 U1.16 | length 191
  Top Layer w8: v1(2800,3841.36) 2816,3857.36 U1.16
  Bottom Layer w8: P5.5 2796.36,3841.36 v1(2800,3841.36)
PB0: P5.1 U1.6 | length 186.2
  Top Layer w8: P5.1 2800.79,4054.21 U1.6
PB1: P5.2 U1.7 | length 152.9
  Top Layer w8: P5.2 2755.75,4050 2771.22,4034.53 U1.7
PB2: P6.1 U1.24 | length 630.9
  Top Layer w8: U1.24 v1(3060.16,3858.03)
  Bottom Layer w8: P6.1 2900,3697.87 v1(3060.16,3858.03)
PB3: P6.2 U1.25 | length 454.6
  Top Layer w8: v1(3057,3722) 3079.84,3744.84 U1.25
  Bottom Layer w8: P6.2 3000,3665 v1(3057,3722)
PB4: P6.3 U1.26 | length 798.8
  Top Layer w8: U1.26 3099.53,3838.47 v1(3115.53,3854.47)
  Bottom Layer w8: P6.3 3139,3326 3221,3326 3239,3344 3239,3492 3199,3532 3199,3771 v1(3115.53,3854.47)
PB5: P6.4 U1.27 | length 455
  Top Layer w8: U1.27 3119.21,3750.79 v1(3161,3709)
  Bottom Layer w8: v1(3161,3709) 3161,3404 P6.4
PB6: 2.4G.3 U1.38 | length 791.3
  Top Layer w8: U1.38 3349.79,3955.79 3426,4032 3426,4129 v1(3405,4150) ; v1(3674,4169) 3714,4129 3811,4129 2.4G.3
  Bottom Layer w8: v1(3405,4150) 3417,4138 3514,4138 3545,4169 v1(3674,4169)
PB7: P7.4 U1.43 | length 358.1
  Top Layer w8: U1.43 3342.79,4054.21 v1(3345,4052)
  Bottom Layer w8: v1(3345,4052) 3365.62,4052 3391.65,4078.02 3566.98,4078.02 P7.4
PB8: P8.1 U1.54 | length 303.2
  Top Layer w8: U1.54 3119.21,4259.15 3160.06,4300 3231.18,4300 3244.39,4313.21 3298.21,4313.21 P8.1
PB9: P8.2 U1.55 | length 228.1
  Top Layer w8: U1.55 3099.53,4268 3144.53,4313 3198,4313 P8.2
PB10: P8.3 U1.57 | length 188.5
  Top Layer w8: U1.57 v1(3060.16,4278)
  Bottom Layer w8: v1(3060.16,4278) 3060.16,4304 3077.16,4321 3106,4321 P8.3
PB11: P8.4 U1.58 | length 141.3
  Top Layer w8: U1.58 3040.47,4258.8 3036.88,4262.39 3036.88,4285.41 3045,4293.53 P8.4
RESET_N: "3.3V Power Source.8" R18.2 RESET.1 U1.63 | length 2070.1
  Top Layer w8: RESET.1 2162,4380 2167.47,4385.47 R18.2 ; 2510.39,4875 v1(2559,4875) ; U1.63 2942.05,4229.8 2939,4229.8 2939,4290.27 2952,4303.27 2989.27,4303.27 3006,4320 3006,4424 v1(3047,4465)
  Bottom Layer w8: RESET.1 2529,4794 ; v1(2559,4875) 2559,4824 2529,4794 ; v1(3047,4465) 3047,4458 3056,4449 3088,4449 3107.77,4468.77 3107.77,4597.23 3055,4650 3024,4650 3015,4641 3015,4608 3007,4600 2984,4600 2790,4794 2529,4794
TWI0: "SCL MUX/DEMUX.5" Accel.7 Gyro.23 MAG.1 R12.2 | length 3616.3
  Top Layer w8: v1(2514,4513) v1@2516,4511 ; v1(2539,3390) 2516,3413 2516,3457 ; v1(2560,3413) 2516,3457 ; Gyro.23 2660.47,4903 2480,4903 2458.87,4881.87 2458.87,4653.13 2516,4596 v1@2516,4511 ; MAG.1 2969.91,4580 2957,4592.91 2957,4632 2967,4642 3029,4642 v1(3044,4627) 3044,4776.26 Accel.7 ; 2516,3457 v1@2516,4511
  Bottom Layer w8: R12.2 2393,3375.47 2404.53,3387 v1@2546,3387 ; v1(2514,4513) 2514,4704 2559,4749 2801,4749 2997,4553 2997,4507 3081.77,4507 3094.77,4520 3094.77,4581.23 3049,4627 v1(3044,4627) ; v1(2539,3390) v1@2546,3387 ; v1(2560,3413) 2606,3367 ; 2656.46,3360 2613,3360 2606,3367 ; v1@2546,3387 2566,3367 2606,3367
TWI0_0: "SCL MUX/DEMUX.13" FB_TWIs.1 R3.2 | length 1205.2
  Top Layer w8: v1(2275,4123) 2375,4023 v1(2375,3588)
  Bottom Layer w8: FB_TWIs.1 2154,4239 2240,4239 2275,4204 v1(2275,4123) ; R3.2 2336,3570.47 ; v1(2375,3588) 2357.47,3570.47 2336,3570.47 ; 2463.54,3410 2384,3410 2372,3422 2372,3534.47 2336,3570.47
TWI0_1: "SDA MUX/DEMUX.13" FB_TWIs.2 R4.2 | length 918.2
  Top Layer w8: R4.2 2160,3694 2166.53,3700.53 2166.53,4151.53 FB_TWIs.2
  Bottom Layer w8: FB_TWIs.2 2176,4161 2176,4082 2208,4050 2353.54,4050
TWI1: "SDA MUX/DEMUX.5" Accel.9 Gyro.24 MAG.16 R13.2 | length 2762.2
  Top Layer w8: v1(2634,4000) 2634,3808 2602,3776 2581,3776 2565,3792 2565,4370 2535,4400 2535,4648.87 2471.87,4712 2471.87,4841.87 2480,4850 2574,4850 v1(2591,4867) 2640.79,4867 Gyro.24 ; v1(2994,4621) 3000,4621 3010.67,4610.33 MAG.16 ; Accel.9 3096.37,4815.63 v1(3118,4794)
  Bottom Layer w8: 2546.46,4000 2597,4000 ; v1(2591,4867) 2748,4867 v1(2994,4621) 2994,4670 v1(3118,4794) ; R13.2 2634,3764.53 2634,3963 2597,4000 ; v1(2634,4000) 2597,4000
TWI1_0: "SCL MUX/DEMUX.14" FB_TWIs.3 R5.2 | length 1127.2
  Top Layer w8: FB_TWIs.3 2153.53,4061.47 2153.53,3761 2123,3730.47 2123,3536 2143,3516 2175.47,3516 v1(2205,3545.53) ; v1(2205,3571) 2288,3571 v1(2399,3460)
  Bottom Layer w8: R5.2 2179.53,3520.06 ; v1(2205,3545.53) 2179.53,3520.06 ; v1(2205,3571) 2179.53,3545.53 2179.53,3520.06 ; v1(2399,3460) 2463.54,3460
TWI1_1: "SDA MUX/DEMUX.14" FB_TWIs.4 R6.2 | length 357.7
  Bottom Layer w8: FB_TWIs.4 2304,4100 ; R6.2 2295,4145.33 2296,4144.33 2296,4108 2304,4100 ; 2353.54,4100 2304,4100
TWI2_0: "SCL MUX/DEMUX.15" FB_TWIs.5 R2.2 | length 1853.3
  Top Layer w8: v1(2539,3563) v1(2539,4350)
  Bottom Layer w8: FB_TWIs.5 2076,4039 2076,4239 2250,4413 2476,4413 v1(2539,4350) ; 2463.54,3510 2522,3510 2522,3546 ; R2.2 2499.53,3649 2522,3649 2522,3546 ; v1(2539,3563) 2522,3546
TWI2_1: "SDA MUX/DEMUX.15" FB_TWIs.6 R7.2 | length 542.2
  Bottom Layer w8: FB_TWIs.6 2238,4023 2403,4023 2412,4032 2412,4150 2410,4150 ; 2353.54,4150 2410,4150 ; R7.2 2459.53,4199.53 2410,4150
TWI3_0: "SCL MUX/DEMUX.12" FB_TWIs.7 R8.2 | length 1437.1
  Bottom Layer w8: R8.2 2384.53,3776 2347,3813.53 2292.53,3813.53 2240,3761 2192,3761 2176,3777 2176,3839 FB_TWIs.7 2076,3861 2076,3352 2112,3316 2255,3316 2281,3342 2428,3342 2428,3360 2463.54,3360
TWI3_1: "SDA MUX/DEMUX.12" FB_TWIs.8 R9.2 | length 574.3
  Bottom Layer w8: FB_TWIs.8 2282.33,3967.33 2282.33,3984 2298.33,4000 2353.54,4000 2454.47,4000 2470.47,3984 2470.47,3837.53 2485,3823 2485,3781 2470.47,3766.47 R9.2
TWI4_0: "SCL MUX/DEMUX.1" FB_TWIs.9 R10.2 | length 1333.9
  Top Layer w8: FB_TWIs.9 2110,3800 2110,3512 2191,3431 v1(2399,3431)
  Bottom Layer w8: FB_TWIs.9 2235.44,3679.56 2235.44,3523.56 2255.47,3523.56 R10.2 ; v1(2399,3431) 2405,3437 2524,3437 2543,3456 2543,3520 2583,3560 2656.46,3560
TWI4_1: "SDA MUX/DEMUX.1" FB_TWIs.10 R11.2 | length 800
  Top Layer w8: v1(2419,3842) 2419,4020 2483,4084 v1(2483,4180)
  Bottom Layer w8: FB_TWIs.10 2242.22,3827.22 2404.22,3827.22 v1(2419,3842) ; v1(2483,4180) 2538.53,4180 2558.53,4200 ; 2546.46,4200 2558.53,4200 ; R11.2 2614.53,4256 2558.53,4200
USBDM: Mini-USB.2 R17.1 | length 191.1
  Top Layer w8: R17.1 3567.31,4370 3628.5,4431.19 Mini-USB.2
USBDP: Mini-USB.3 R16.1 | length 604.6
  Top Layer w8: R16.1 3444.53,4236 3421,4259.53 3421,4517 3456,4552 3652,4552 3660,4544 Mini-USB.3
VBUS: C14.1 C15.1 Ferrite.2 U1.52 | length 1215.3
  Top Layer w8: C15.1 Ferrite.2 3240.53,4754.53 3254,4768 3254,4865 3264,4875 3338.53,4875 3349.53,4864 C14.1 3349.53,4800 3357.53,4792 3383,4792 3391,4784 3391,4320 3371.21,4300.21 3257.39,4300.21 3244.18,4287 3177.64,4287 3158.58,4267.94 U1.52
VIN: "3.3V Power Source.3" "3.3V Power Source.4" Battery.2 C2.2 | length 254.1
  Top Layer w8: Battery.2 2199.53,4740 C2.2 2255.47,4765.47 2265,4775 2309.61,4775 2309.61,4725
pads on no net: Accel.1 Accel.6 Accel.11 Accel.12 Gyro.1 Gyro.2 Gyro.3 Gyro.4 Gyro.5 Gyro.14 Gyro.15 Gyro.16 Gyro.17 Gyro.19 Gyro.21 Gyro.22 Gyro.25 MAG.3 MAG.5 MAG.6 MAG.7 MAG.14 Mini-USB.MH1 Mini-USB.MH2 Mini-USB.MH3 Mini-USB.MH4
copper on no net:
  other v2: 2666.38,4771.38 2713.62,4771.38 2666.38,4818.62 2713.62,4818.62

## Keep-outs
Keep-Out Layer:
  lines w10: 2050,3050 3918,3050 3918,4918 2050,4918 2050,3050

## Dimensions
2050,3050 to 3918,3050 on Mechanical 1
2050,3050 to 2050,4918 on Mechanical 1

## Text inside footprints (layer, text, board x,y; h text height)
2.4G: Top Overlay "8" at 3770,4350 h50 r90; Top Overlay "7" at 3870,4350 h50 r90; Top Overlay "1" at 3870,3910 h50 r90; Top Overlay "2" at 3770,3890 h50 r90
FB_TWIs: Top Overlay "2" at 2195,4300 h50 r270; Top Overlay "1" at 2095,4280 h50 r270; Top Overlay "9" at 2095,3740 h50 r270; Top Overlay "10" at 2195,3740 h50 r270
JTAG: Top Overlay "1" at 3750,3425 h50 r180; Top Overlay "2" at 3770,3325 h50 r180; Top Overlay "5" at 3410,3425 h50 r180; Top Overlay "6" at 3410,3325 h50 r180